# Altium PCB gateway(1).PcbDoc
Units mil, origin at the board's own origin, x right, y up, seen from the top; angles counter-clockwise.
Board outline 6000 x 4000 mil, 2 copper layers (Top Layer, Bottom Layer); 90 components, 78 nets, 356 pads, 205 vias.
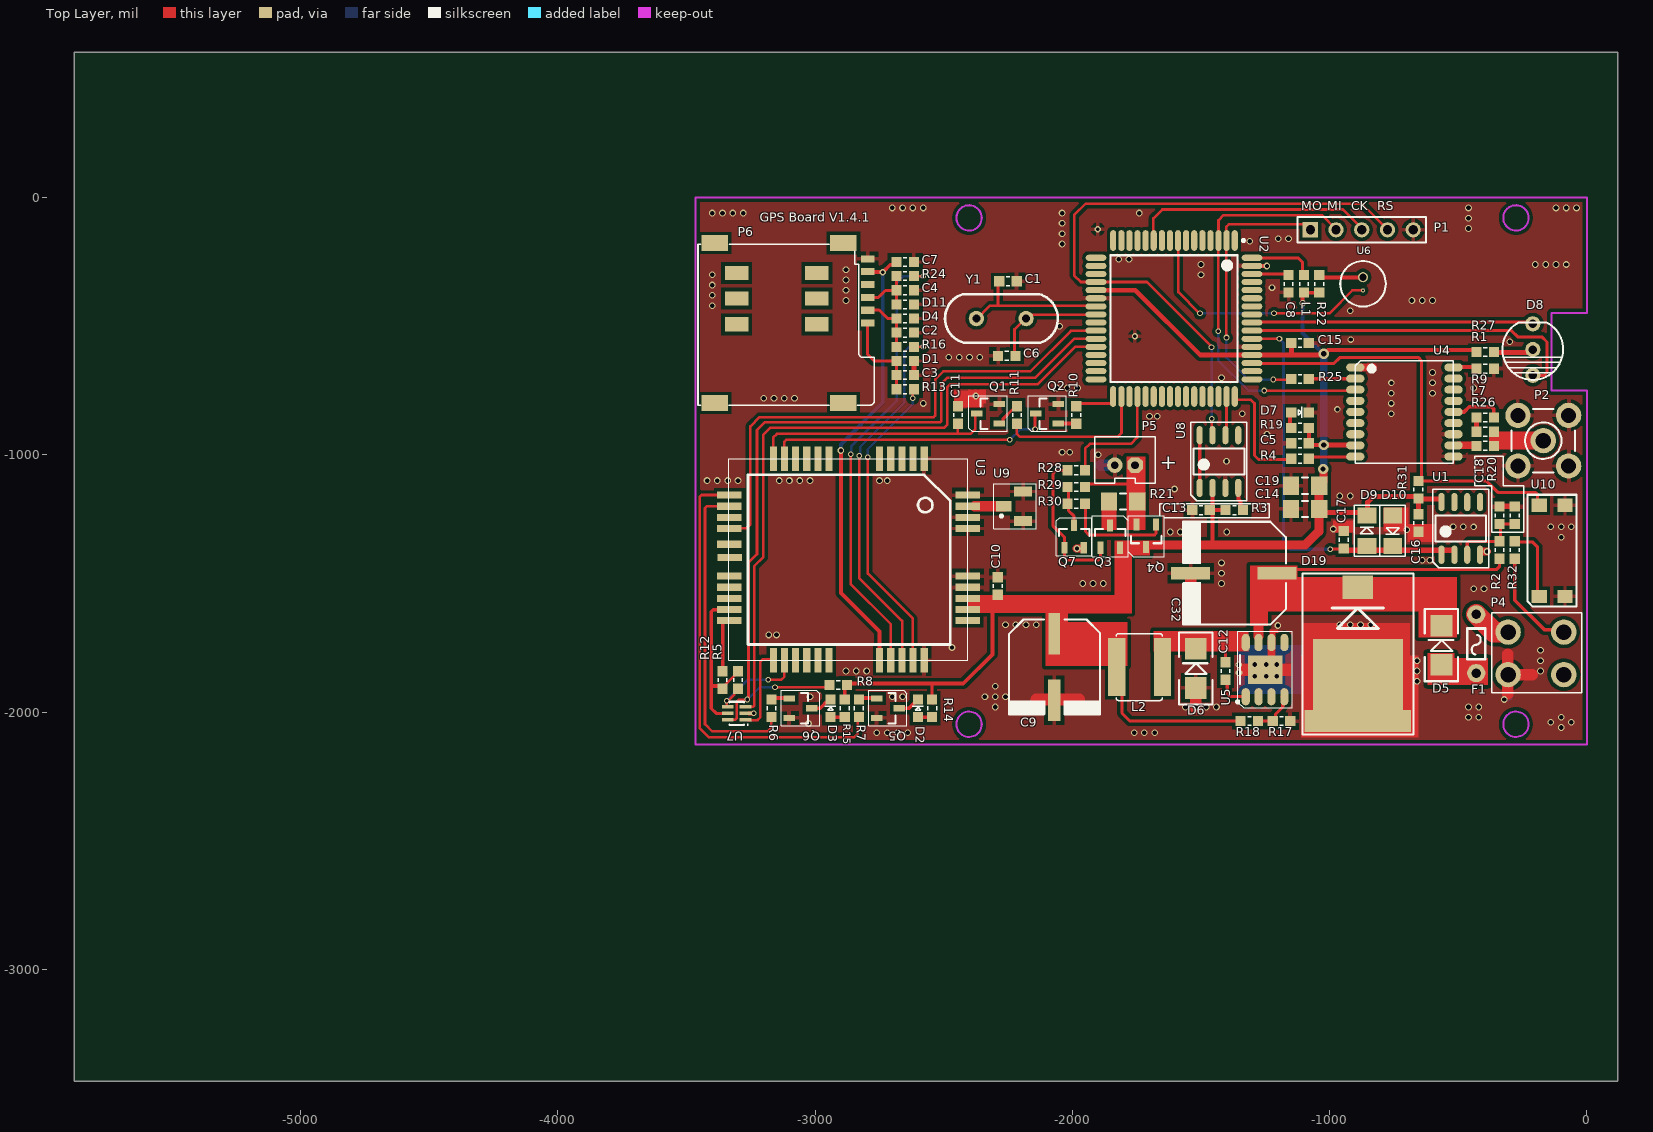
[diagram p0: Top Layer view]
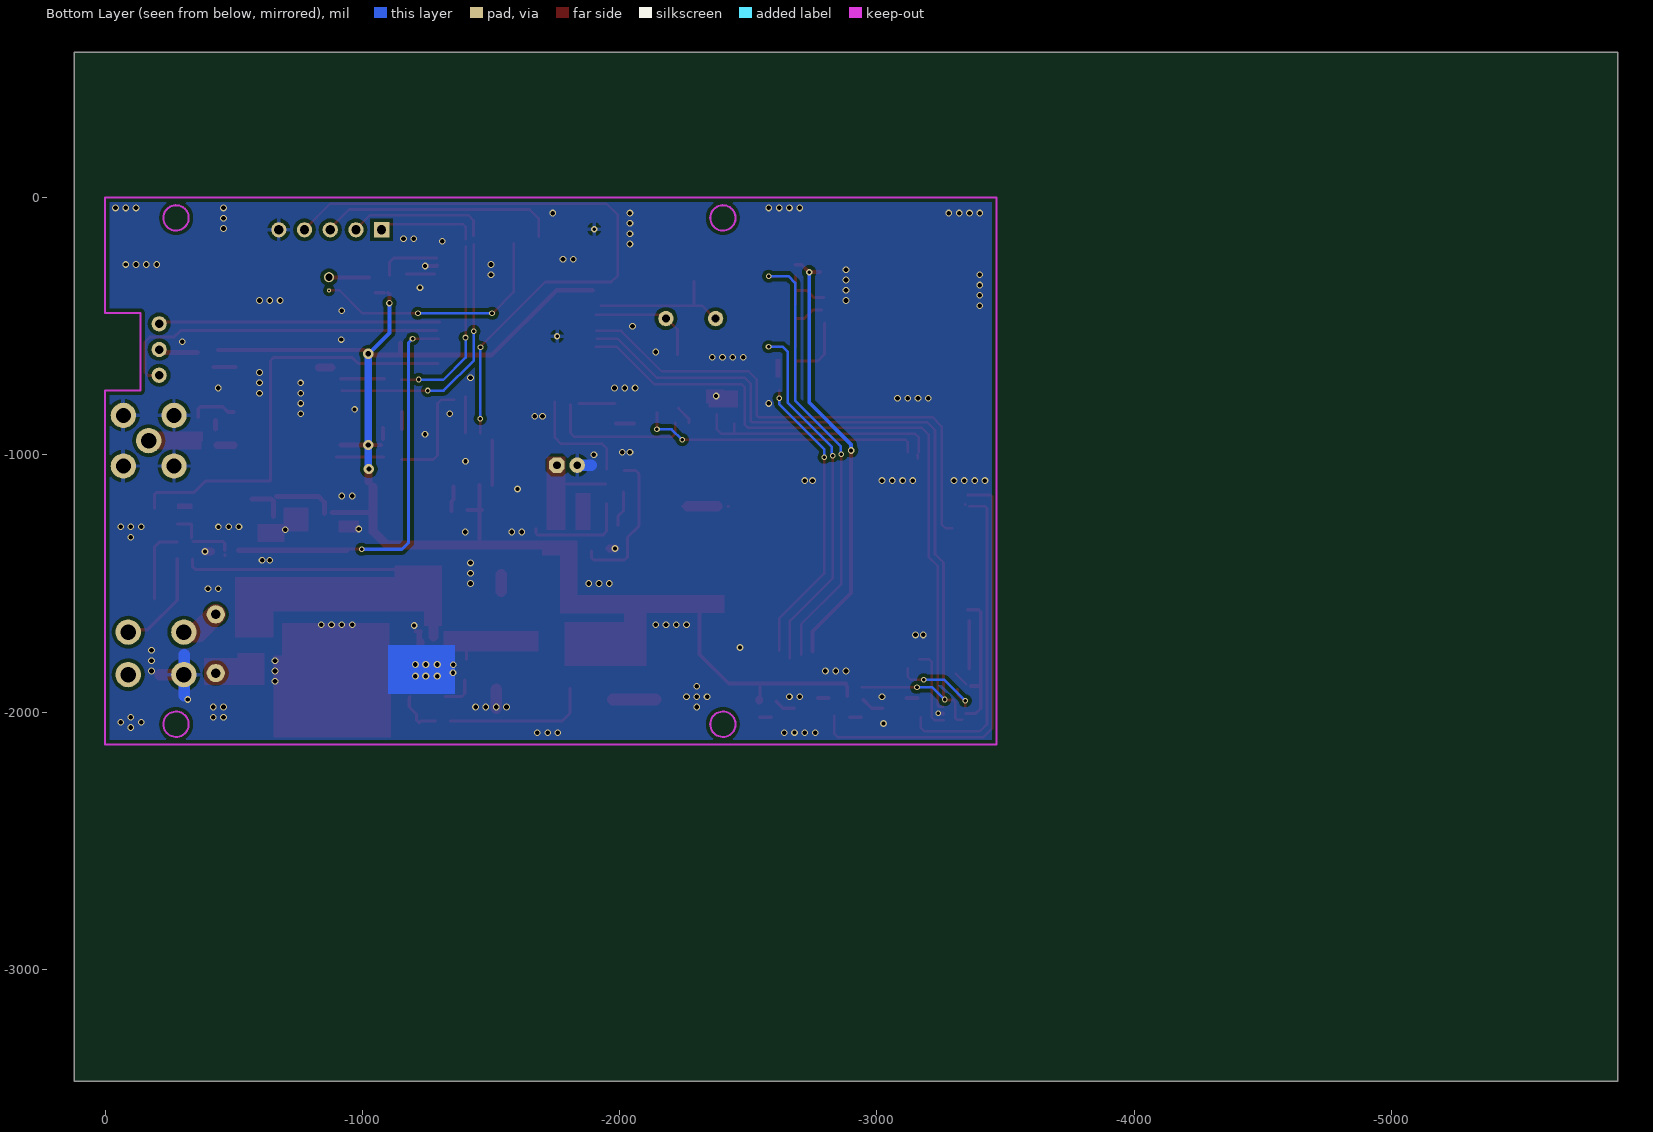
[diagram p1: Bottom Layer view, seen from below]

## Layer stack, top to bottom
Top Layer: signal copper 1.4
Dielectric: dielectric 12.6, FR-4, Dk 4.8
Bottom Layer: signal copper 1.4

## Board outline
-5880,-3435 120,-3435 120,565 -5880,565

## Design rules (kind name [scope] priority, off if disabled: settings)
Clearance [All] p1 off: gap=14
ComponentClearance [All] p1 off: gap=10 collisioncheckmode=3 verticalgap=10
PolygonConnect [All] p1: connectstyle=Relief reliefconductorwidth=15 reliefentries=4 polygonreliefangle="90 Angle"
RoutingVias [All] p1: holewidth=28 width=50 viastyle="Through Hole" minholewidth=10 minwidth=20 maxholewidth=28 maxwidth=50
SolderMaskExpansion [All] p1: expansion=4
TestPointUsage [All] p1: valid=0 allowmultiple=FALSE
Testpoint [All] p1: side=15 testpointundercomponent=TRUE minsize=40 maxsize=100 preferedsize=60 minholesize=0 maxholesize=40 preferedholesize=32 testpointgrid=1 style=1023 order=0123456789
Width [All] p1: maxlimit=200 minlimit=8 preferedwidth=10 toplayer_prefwidth=12 bottomlayer_prefwidth=12 minimp=50.000000 maximp=50.000000 favimp=50.000000
18 further rules are at their usual default settings.

## Components (designator, comment, footprint, x,y, rotation, side; value= is the part's Value field where it differs from the comment)
C1 "Cap" 0603 -2250,-325 r0 top
C2 "Cap" 0603 -2650,-525 r0 top
C3 "Cap" 0603 -2650,-690 r180 top
C4 "Cap" 0603 -2650,-360 r0 top
C5 "Cap" 0603 -1115,-955 r0 top
C6 "Cap" 0603 -2255,-615 r180 top
C7 "Cap" 0603 -2650,-250 r180 top
C8 "Cap" 0603 -1160,-335 r270 top
C9 "Cap Pol3" C8X10-SMD -2070,-1825 r270 top
C10 "Cap" 0603 -2290,-1510 r270 top
C11 "Cap" 0603 -2445,-845 r90 top
C12 "Cap" 0603 -1405,-1840 r270 top
C13 "Cap" 0603 -1500,-1215 r0 top
C14 "Cap" 3216[1206] -1095,-1210 r0 top
C15 "Cap" 0603 -1115,-565 r180 top
C16 "Cap" 0603 -655,-1265 r270 top
C17 "Cap" 0603 -945,-1330 r270 top
C18 "Cap" 0603 -340,-1235 r90 top
C19 "Cap" 3216[1206] -1095,-1120 r0 top
C32 "Cap Pol3" C10-SMD -1370,-1460 r180 top
D1 "RL0603E012M100K" 0603 -2650,-635 r0 top
D2 "WORK" 0603-LED -2600,-1985 r90 top
D3 "LINK" 0603-LED -2940,-1985 r90 top
D4 "RL0603E012M100K" 0603 -2650,-470 r0 top
D5 "SS54" SMA -565,-1740 r90 top
D6 "SS54" SMA -1520,-1830 r90 top
D7 "PW" 0603-LED -1115,-835 r0 top
D8 "LED" DIP-3 -210,-590.55 r90 top
D9 "4148" LL34 -855,-1295 r90 top
D10 "4148" LL34 -755,-1295 r270 top
D11 "RL0603E012M100K" 0603 -2650,-415 r0 top
D19 "SLD8S33A" SMTO-263 -890,-2035 r180 top
F1 "Fuse Thermal" PPTC-5.8 -430,-1620 r270 top
L1 "Inductor" 0603 -1100,-335 r270 top
L2 "Inductor" L-6045 -1650,-1825 r180 top
L7 "Inductor" 0603 -395,-910 r180 top
P1 "ISP" HDR1X5 -1075,-125 r0 top
P2 "ANTA" SMB_V-RJ45 -169.29,-944.88 r180 top locked
P4 "POW" 5569 -89.57,-1854.33 r90 top
P5 "BAT" PH2.0-2P -1835,-1040 r180 top
P6 "MircoSIM" "MICRO SIM" -3305,-292.52 r270 top
Q1 "NPN" SOT-23-NPN -2330,-840 r90 top
Q2 "NPN" SOT-23-NPN -2100,-840 r90 top
Q3 "PNP" SOT-23-PNP -1853,-1316 r0 top
Q4 "PNP" SOT-23-PNP -1713,-1316 r180 top
Q5 "NPN" SOT-23-NPN -2715,-1985 r270 top
Q6 "NPN" SOT-23-NPN -3055,-1985 r270 top
Q7 "NPN" SOT-23-NPN -1993,-1316 r0 top
R1 "Res1" 0603 -395,-665 r180 top
R2 "Res1" 0603 -340,-1370 r270 top
R3 "Res1" 0603 -1370,-1215 r180 top
R4 "Res1" 0603 -1115,-1015 r0 top
R5 "Res1" 0603 -3300,-1875 r270 top
R6 "Res1" 0603 -3170,-1985 r90 top
R7 "Res1" 0603 -2830,-1985 r90 top
R8 "Res1" 0603 -2910,-1895 r0 top
R9 "Res1" 0603 -395,-855 r0 top
R10 "Res1" 0603 -1985,-845 r90 top
R11 "Res1" 0603 -2215,-845 r270 top
R12 "Res1" 0603 -3360,-1875 r270 top
R13 "Res1" 0603 -2650,-745 r0 top
R14 "Res1" 0603 -2545,-1985 r270 top
R15 "Res1" 0603 -2885,-1985 r270 top
R16 "Res1" 0603 -2650,-580 r0 top
R17 "Res1" 0603 -1187,-2035 r180 top
R18 "Res1" 0603 -1312,-2035 r0 top
R19 "Res1" 0603 -1115,-895 r180 top
R20 "Res1" 0603 -280,-1235 r270 top
R21 "Res1" 3216[1206] -1803,-1181 r0 top
R22 "Res1" 0603 -1040,-335 r270 top
R24 "Res1" 0603 -2650,-305 r0 top
R25 "Res1" 0603 -1115,-705 r180 top
R26 "Res1" 0603 -395,-965 r180 top
R27 "Res1" 0603 -395,-600 r180 top
R28 "Res1" 0603 -1985,-1060 r0 top
R29 "Res1" 0603 -1985,-1125 r180 top
R30 "Res1" 0603 -1985,-1190 r180 top
R31 "Res1" 0603 -655,-1135 r270 top
R32 "Res1" 0603 -280,-1370 r90 top
U1 "LM358D" SOIC8 -490,-1285 r90 top
U2 "ATmega64-16AC" 64A_M -1605,-470 r270 top
U3 "G3524" G3524 -2635,-1430 r270 top
U4 "L70-R" L-70R -900,-660 r180 top
U5 "LM22676" ? -1251,-1835 r90 top
U6 "SW-18015P" SW-18015 -870,-335 r270 top
U7 "NC7WZ07" SC70-6 -3305,-2005 r90 top
U8 "MAX706RCSA" SOIC8 -1430,-1025 r90 top
U9 "IPEX" IPEX -2220,-1200 r180 top
U10 "EL817" PCBComponent_1 -185,-1550 r90 top
Y1 "XTAL" 49SD -2180,-470 r180 top

## Footprints (in the part's own frame and the unit in brackets; to place one, negate y for a bottom-side part, rotate by r counter-clockwise, add the part's x,y. Pads: shape width x height; smd on the part's side, far side on the other; paste and mask are expansions set on the pad)
49SD [mil]
  round 60 hole 30: 1(0,0) 2(193,0)
  silkscreen extent -124,-95 315,94
64A_M [mm] "64-Pin Thin Quad Flat Pack 0.8 mm Pitch, IPC Low Density"
  oval 2.05x0.6 smd: 1(-7.7,6) 2(-7.7,5.2) 3(-7.7,4.4) 4(-7.7,3.6) 5(-7.7,2.8) 6(-7.7,2) 7(-7.7,1.2) 8(-7.7,0.4) 9(-7.7,-0.4) 10(-7.7,-1.2) 11(-7.7,-2) 12(-7.7,-2.8) 13(-7.7,-3.6) 14(-7.7,-4.4) 15(-7.7,-5.2) 16(-7.7,-6) 33(7.7,-6) 34(7.7,-5.2) 35(7.7,-4.4) 36(7.7,-3.6) 37(7.7,-2.8) 38(7.7,-2) 39(7.7,-1.2) 40(7.7,-0.4) 41(7.7,0.4) 42(7.7,1.2) 43(7.7,2) 44(7.7,2.8) 45(7.7,3.6) 46(7.7,4.4) 47(7.7,5.2) 48(7.7,6)
  oval 0.6x2.05 smd: 17(-6,-7.7) 18(-5.2,-7.7) 19(-4.4,-7.7) 20(-3.6,-7.7) 21(-2.8,-7.7) 22(-2,-7.7) 23(-1.2,-7.7) 24(-0.4,-7.7) 25(0.4,-7.7) 26(1.2,-7.7) 27(2,-7.7) 28(2.8,-7.7) 29(3.6,-7.7) 30(4.4,-7.7) 31(5.2,-7.7) 32(6,-7.7) 49(6,7.7) 50(5.2,7.7) 51(4.4,7.7) 52(3.6,7.7) 53(2.8,7.7) 54(2,7.7) 55(1.2,7.7) 56(0.4,7.7) 57(-0.4,7.7) 58(-1.2,7.7) 59(-2,7.7) 60(-2.8,7.7) 61(-3.6,7.7) 62(-4.4,7.7) 63(-5.2,7.7) 64(-6,7.7)
  silkscreen extent -7.82,-6.25 6.25,6.98, body extent -7,-7 7,7, height 1.2
0603 [mm]
  rect 1x1 smd: 1(-0.864,0) 2(0.864,0)
  silkscreen extent -0.18,-0.43 0.18,0.43
0603-LED [mm]
  rect 1x1 smd: 1(-0.864,0) 2(0.864,0)
  silkscreen extent -0.18,-0.51 0.18,0.56
3216[1206] [mm] "Chip Resistor; Body 3.2 x 1.6 mm (LxW typ)"
  rect 1.6x1.8 smd: 1(-1.4,0) 2(1.4,0)
  silkscreen extent -0.3,-0.8 0.3,0.8
5569 [mm]
  round 2.5 hole 1.524: 1(0,0) 2(4.2,0) 3(4.2,5.5) 4(0,5.5)
  silkscreen extent -1.78,-1.78 6.1,7.11
C8X10-SMD [mm]
  rect 4.1x1.148 smd: 1(-3.277,0)
  rect 4.1x1.25 smd: 2(3.277,0)
  silkscreen extent -4.7,-4.5 4.7,4.5, body extent -4.65,-4.25 4.65,4.25, height 10.5
C10-SMD [mm]
  rect 3.85x1.25 smd: 1(-4.191,0) 2(4.318,0)
  silkscreen extent -5.08,-5.08 5.08,5.08
DIP-3 [mm]
  round 1.5 hole 0.84: 1(-2.54,0) 2(0,0) 3(2.54,0)
  silkscreen extent -2.99,-2.99 2.68,3.01
G3524 [mm]
  rect 2.4x0.7 smd: 1(-10.55,1.5) 2(-10.55,0.4) 3(-10.55,-0.7) 4(-10.55,-1.8) 5(-10.55,-2.9) 6(-10.55,-7.9) 7(-10.55,-9) 8(-10.55,-10.1) 9(-10.55,-11.2) 10(-10.55,-12.3) 11(-10.55,-13.4) 21(9.35,-13.4) 22(9.35,-12.3) 23(9.35,-11.2) 24(9.35,-10.1) 25(9.35,-9) 26(9.35,-7.9) 27(9.35,-2.9) 28(9.35,-1.8) 29(9.35,-0.7) 30(9.35,0.4) 31(9.35,1.5)
  rect 0.7x2.4 smd: 12(-6.95,-17.75) 13(-5.85,-17.75) 14(-4.75,-17.75) 15(-3.65,-17.75) 16(1.05,-17.75) 17(2.15,-17.75) 18(3.25,-17.75) 19(4.35,-17.75) 20(5.45,-17.75) 32(5.45,5.8) 33(4.35,5.8) 34(3.25,5.8) 35(2.15,5.8) 36(1.05,5.8) 37(-3.65,5.8) 38(-4.75,5.8) 39(-5.85,5.8) 40(-6.95,5.8) 41(-2.1,-17.75) 42(-0.8,-17.7)
  silkscreen extent -10.55,-17.8 9.35,5.8
HDR1X5 [mm] "Connector; Header; 5 Position"
  rect 1.5x1.5 hole 0.9: 1(0,0)
  round 1.5 hole 0.9: 2(2.54,0) 3(5.08,0) 4(7.62,0) 5(10.16,0)
  silkscreen extent -1.27,-1.27 11.43,1.27
IPEX [mil] "SOT23, 3-Leads, Body 3.0x2.6mm (max), Pitch 0.95mm, IPC Medium Density"
  rect 59.06x41.34 smd: 1(46.5,-0.5)
  rect 70.87x39.37 smd: 2(-28.5,57.5) 3(-28.5,-57.5)
  silkscreen extent -80,-89 86,88
L-70R [mm]
  oval 1.8x0.8 smd: 1(0,0) 2(0,1.1) 3(0,2.2) 4(0,3.3) 5(0,4.4) 6(0,5.5) 7(0,6.6) 8(0,7.7) 9(0,8.8) 10(-9.7,8.8) 11(-9.7,7.7) 12(-9.7,6.6) 13(-9.7,5.5) 14(-9.7,4.4) 15(-9.7,3.3) 16(-9.7,2.2) 17(-9.7,1.1) 18(-9.7,0)
  silkscreen extent -9.65,-0.66 0,9.47
L-6045 [mm]
  rect 1.7x5.7 smd: 1(0,0) 2(4.5,0)
  silkscreen extent 0,-3.3 4.57,3.3
LL34 [mm] "MELF Diode, 2-Leads, Body 3.3x1.6mm, IPC Medium Density"
  rect 1.575x1.85 smd: 1(-1.5,0) 2(1.5,0)
  silkscreen extent -2.54,-1.27 2.54,1.27, body extent -1.65,-0.82 1.65,0.82, height 1.65
"MICRO SIM" [mm]
  rect 1.55x2.6 smd: 0(-2.95,10.53) 0(-2.95,-2.15) 0(12.85,10.53) 0(12.85,-2.15)
  rect 1.4x2.3 smd: 0(0,7.92) 0(0,0) 0(2.54,7.92) 0(2.54,0) 0(5.08,7.92) 0(5.08,0)
  rect 0.7x1.35 smd: 1(-0.12,12.955) 2(2.42,12.955) 3(4.96,12.955) 5(-1.39,12.955) 6(1.15,12.955) 7(3.69,12.955)
  silkscreen extent -2.82,-3.82 13.05,13.58
PCBComponent_1 [mm]
  rect 1.3x1.5 smd: 1(0,0) 2(0,-2.54) 3(9,-2.54) 4(9,0)
  round 0.635 on Top Overlay: 3(-0.254,1.778)
  silkscreen extent -1.02,-3.68 10.03,1.14
PH2.0-2P [mil]
  oct 60x60 hole 30: 1(-78.74,0)
  round 60 hole 30: 2(0,0)
  silkscreen extent -157,-110 79,70
PPTC-5.8 [mm]
  round 1.8 hole 0.92: 1(0,0) 2(5.8,0)
  silkscreen extent 1.4,-0.89 4.44,0.89
SC70-6 [mm]
  rect 0.35x1.15 smd: 1(-0.65,-0.875) 2(0,-0.875) 3(0.65,-0.875) 4(0.65,0.889) 5(0,0.889) 6(-0.65,0.889)
  silkscreen extent -1.17,-1.15 1.15,0.7
SMA [mm] "Molded Diode, 2-Leads, Body 4.3x2.7mm, IPC Medium Density"
  rect 2.15x2.15 smd: 1(-1.93,0) 2(1.93,0)
  silkscreen extent -3.56,-1.65 3.56,1.65, body extent -2.28,-1.42 2.29,1.42, height 2.95
SMB_V-RJ45 [mm] "Connector; SMB Straight"
  round 2.5 hole 1.5: 1(0,0) 2(-2.5,2.5) 2(-2.5,-2.5) 2(2.5,2.5) 2(2.5,-2.5)
  silkscreen extent -3.15,-3.15 3.15,3.15
SMTO-263 [mm]
  rect 3x2.3 smd: 1(0,-13.208)
  rect 10.5x2.16 smd: 2(0,0)
  rect 8.89x7.05 smd: 2(0,-4.572)
  silkscreen extent -5.49,-14.55 5.49,1.32
SOIC8 [mm]
  oval 1.8x0.6 smd: 1(-2.625,1.905) 2(-2.625,0.635) 3(-2.625,-0.635) 4(-2.625,-1.905) 5(2.575,-1.905) 6(2.575,-0.635) 7(2.575,0.635) 8(2.575,1.905)
  silkscreen extent -3.89,-2.74 3.84,2.77, body extent -2.03,-2.5 1.97,2.5, height 1.76
SOT-23-NPN [mm]
  rect 0.6x1.143 smd: 1(0.95,-1.15) 2(-0.95,-1.15) 3(0,1.067)
  silkscreen extent -1.75,-1.93 1.75,1.83, body extent -1.5,-0.7 1.5,0.7, height 1.1
SOT-23-PNP [mm]
  rect 0.6x1.2 smd: 1(0.95,-1.15) 2(-0.95,-1.15) 3(0,1.067)
  silkscreen extent -1.78,-2.03 1.78,2.03, body extent -1.5,-0.7 1.5,0.7, height 1.1
SW-18015 [mm]
  round 0.4 hole 0.2: 1(0.65,0)
  round 1 hole 0.7: 2(-0.65,0)
  silkscreen extent -2.25,-2.25 2.25,2.25
? [mm]
  oval 1.7x0.8 smd: 1(-2.675,1.905) 2(-2.675,0.635) 3(-2.675,-0.635) 4(-2.675,-1.905) 5(2.675,-1.905) 6(2.675,-0.635) 7(2.675,0.635) 8(2.675,1.905)
  rect 2.8x3.4 smd: 9(0,0)
  silkscreen extent -3.78,-2.7 3.77,2.82

## Part data
C1 C2 C3 C4 C5 C6 C7 C8 C10 C11 C12 C13 C14 C15 C16 C17 C18 C19: "Capacitor"
C9: library part "Cap Pol1", "Polarized Capacitor (Radial)"
C32: "Polarized Capacitor (Surface Mount)"
D1: library part SMF05C
D2 D3 D7 D8: library part LED2, "Typical RED, GREEN, YELLOW, AMBER GaAs LED"
D4 D11 D19: library part "Diode 18TQ045", "Schottky Rectifier"
D5 D6 D9 D10: library part "Diode 1N5408", "3 Amp Medium Power Silicon Rectifier Diode"
F1: "Thermal Fuse"
P1: library part "Header 5", "Header, 5-Pin"
P2: library part SMB, "SMB Straight Connector"
P4 P5: library part "Header 2", "Header, 2-Pin"
Q1 Q2 Q5 Q6 Q7: library part 2N5551, "NPN General Purpose Amplifier"
Q3 Q4: library part 2N5401, "PNP General Purpose Amplifier"
R1 R2 R3 R4 R5 R6 R7 R8 R9 R10 R11 R12 R13 R14 R15 R16 R17 R18 R19 R20 R21 R22 R24 R25 R26 R27 R28 R29 R30 R31 R32: "Resistor"
U1: "Dual Low-Power Operational Amplifier"
U2: library part ATmega8-16AC, "8-Bit AVR Microcontroller with 8K Bytes of In-System Programmable Flash Memory"
U3: library part USR-GM3
U4: library part UM220-III
U5: library part LM22676-5.0
U6: library part LP5907
U8: "+3V Voltage Monitoring, Low-Cost, 礟 Supervisory Circuit"
U10: library part Optoisolator1, "4-Pin Phototransistor Optocoupler"
Y1: "Crystal Oscillator"

## Via types
v1: diameter 26, hole 18, Top Layer to Bottom Layer, 146 vias
v2: diameter 22, hole 14, Top Layer to Bottom Layer, 23 vias
v3: diameter 26, hole 16, Top Layer to Bottom Layer, 22 vias
v4: diameter 28, hole 18, Top Layer to Bottom Layer, 6 vias
v5: diameter 26, hole 15, Top Layer to Bottom Layer, 2 vias
v6: diameter 40, hole 20, Top Layer to Bottom Layer, 2 vias
v7: diameter 24, hole 14, Top Layer to Bottom Layer, 2 vias
v8: diameter 25, hole 15, Top Layer to Bottom Layer, 1 vias
v9: diameter 40, hole 22, Top Layer to Bottom Layer, 1 vias

## Nets (pads, with @x,y where several pads share a name; then routed paths per layer and width w, separated by ;. In a path a pad name is that pad's centre, name@x,y a point inside that pad or via, vN(x,y) a via of type N, cw(c..) or ccw(c..) an arc to the next point about the centre after c; other vN are vias at no path point)
+4.2V: C5.2 C9.1 C10.2 C13.2 C14.2 C15.2 C16.1 C19.2 D9.2 L1.2 L2.2 Q3.1 Q4.3 R3.2 R8.2 R14.1 R15.1 R18.1 R19.1 R22.2 R27.2 R31.2 U1.8 U2.21 U2.52 U3.33 U3.34 U4.8 U8.2 | length 5736.5
  Top Layer w12: R14.1@-2545,-1947 -2545,-1888 ; L2.2@-1807,-1907 -1807,-2004 -1776,-2035 R18.1@-1341,-2035
  Top Layer w15: R15.1@-2885,-1937 -2885,-1900 R8.2@-2874,-1889 ; R8.2@-2880,-1889 -2424,-1889 -2311,-1776 -2311,-1596 ; C13.2@-1465,-1215 R3.2@-1409,-1215 ; -1455,-1348 U8.2@-1455,-1117 ; v8(-1105,-410) L1.2@-1105,-374 ; L1.2@-1085,-370 R22.2@-1051,-370 ; C5.2@-1080,-939 R19.1@-1080,-905 ; C5.2@-1073,-962 v6@-1024,-962 ; v9@-1020,-606 -1007,-593 R27.2@-439,-593
  Top Layer w18: U2.21@-1895,-360 -1755,-360 -1503.27,-611.73 v9@-1036.73,-611.73 ; -1148,-607 C15.2@-1148,-565
  Top Layer w20: v6@-1024,-962 U4.8@-918,-962 ; C14.2@-1020,-1224 D9.2@-882,-1224 ; D9.2@-852,-1227 -852,-1184 -830,-1162 R31.2@-666,-1162 ; C16.1@-655,-1239 R31.2@-655,-1179 ; R31.2@-646,-1172 U1.8@-571,-1172
  Top Layer w30: R14.1@-2543.27,-1950.89 R14.1@-2543,-1955 ; C19.2@-1024,-1104.12 v6@-1024,-1055
  Top Layer w35: Q4.3@-1720,-1350 -1095,-1350 -1042,-1297 C19.2@-1042,-1125
  Bottom Layer w15: v8(-1105,-410) -1105,-526 v9@-1023,-608
  Bottom Layer w30: v6@-1023,-1056 v9@-1023,-608
  other v6: -1025,-1055 -1023,-962
  other v9: -1023,-607
ACC: P4.2 R32.1 | length 403.6
  Top Layer w15: R32.1 -280,-1565 -165,-1680 P4.2@-85,-1680
ACC_T: R31.1 U2.51 U10.4 | length 1658
  Top Layer w12: U2.51@-1293,-644.88 -983.88,-644.88 -961,-622 -654,-622 -643,-633 R31.1@-643,-1101 ; R31.1@-642,-1102 -389,-1102 -344,-1147 -199,-1147 -191,-1155 U10.4@-191,-1208
BAT: R28.2 U2.36 | length 439.4
  Top Layer w10: R28.2@-1950,-1055 -1950,-975 -1932,-957 -1772,-957 -1748,-933 U2.36@-1748,-793
D1: D8.1 U2.55 | length 1309.9
  Top Layer w12: U2.55@-1290,-517 -293,-517 -269,-541 -175,-541 -155,-561 -155,-679.55 -167.45,-692 D8.1@-188,-692
D2: D8.3 U2.56 | length 1092
  Top Layer w12: U2.56@-1301,-484 D8.3@-209,-484
DOG: U2.47 U8.6 | length 142
  Top Layer w12: U8.6@-1401,-915 U2.47@-1401,-773
GIO2: U2.57
GND: C1.2 C2.2 C3.1 C4.2 C5.1 C6.2 C7.1 C8.2 C9.2 C10.1 C11.2 C13.1 C14.1 C15.1 C16.2 C17.1 C18.2 C19.1 C32.2 D1.2 D4.2 D6.1 D7.2 D10.1 D11.2 D19.2 P1.5 P2.2 P4.4 P5.2 P6.5 Q1.1 Q2.1 Q5.1 Q6.1 Q7.1 R1.1 R17.1 R20.1 U1.4 U2.22 U2.53 U2.63 U3.1 U3.31 U3.35 U3.36 U3.37 U3.38 U3.40 U4.1 U4.10 U4.12 U5.6 U5.9 U7.2 U8.3 U9.2 U9.3 U10.2 U10.3@-85,-1195.67 | length 1000.7
  Top Layer w15: U7.2@-3258,-2005 v2(-3238,-2005)
  Top Layer w16: U2.63@-1290,-265 v3@-1245.99,-265.35
  Top Layer w30: v3@-1983.68,-1364 Q7.1@-1961,-1364 ; U5.9@-1226,-1794 U5.6@-1226,-1726 ; U4.1@-880,-660 -830,-660 ; U1.4@-412,-1376 v3(-388,-1376)
  Top Layer w45: -2141,-1951 -1974,-1951 ; -1539,-1531 C32.2@-1539,-1466 ; v1@-1520,-1984 D6.1@-1520,-1911 ; -308,-1928 -308,-1775 ; P4.4@-307,-1854 -213,-1854
  Bottom Layer w45: -1890,-1040 P5.2@-1830,-1040 ; -307,-1937 -307,-1777
  other v1: -2760,-2080 -2720,-2080 -2640,-2080 -1760,-2080 -1720,-2080 -1680,-2080 -100,-2060 -140,-2040 -60,-2040 -460,-2020 -420,-2020 -100,-2020 -2300,-1980 -1560,-1980 -1520,-1980 -1480,-1980 -1440,-1980 -460,-1980 -420,-1980 -3020,-1940 -2700,-1940 -2660,-1940 -2340,-1940 -2300,-1940 -2260,-1940 -2300,-1900 -660,-1880 -2880,-1840 -2840,-1840 -2800,-1840 -660,-1840 -180,-1840 -660,-1800 -180,-1800 -180,-1760 -3180,-1700 -3150,-1700 -2260,-1660 -2220,-1660 -2180,-1660 -2140,-1660 -960,-1660 -920,-1660 -880,-1660 -840,-1660 -440,-1520 -400,-1520 -1960,-1500 -1920,-1500 -1880,-1500 -1420,-1500 -1420,-1460 -1420,-1420 -640,-1410 -610,-1410 -100,-1320 -1620,-1300 -1580,-1300 -1400,-1300 -520,-1280 -480,-1280 -140,-1280 -100,-1280 -60,-1280 -960,-1160 -920,-1160 -3420,-1100 -3380,-1100 -3340,-1100 -3300,-1100 -3140,-1100 -3100,-1100 -3060,-1100 -3020,-1100 -2750,-1100 -2720,-1100 -1900,-1000 -2040,-990 -2010,-990 -1700,-850 -1670,-850 -1340,-840 -760,-840 -2580,-800 -760,-800 -3200,-780 -3160,-780 -3120,-780 -3080,-780 -760,-760 -600,-760 -2060,-740 -2020,-740 -1980,-740 -440,-740 -600,-720 -1420,-700 -600,-680 -2480,-620 -2440,-620 -2400,-620 -2360,-620 -2140,-600 -300,-560 -2050,-500 -920,-440 -3400,-420 -2880,-400 -680,-400 -640,-400 -600,-400 -3400,-380 -2880,-360 -3400,-340 -2880,-320 -3400,-300 -1500,-300 -2880,-280 -1500,-260 -200,-260 -160,-260 -120,-260 -1820,-240 -1780,-240 -2040,-180 -1310,-170 -1200,-160 -1160,-160 -2040,-140 -460,-120 -2040,-100 -460,-80 -3400,-60 -3360,-60 -3320,-60 -3280,-60 -2040,-60 -1740,-60 -2700,-40 -2660,-40 -2620,-40 -2580,-40 -460,-40 -120,-40 -80,-40 -40,-40
  other v3: -2680,-2080 -3026,-2044 -321,-1951 -1352,-1847 -1353,-1816 -2468,-1749 -1201,-1663 -1982,-1364 -700,-1291 -986,-1288 -440,-1280 -1603,-1133 -1401,-1025 -1243,-920 -970,-823 -2375,-771 -760,-720 -918,-552 -1224,-350 -1244,-266 -80,-260
  other v4: -1291,-1860 -1246,-1860 -1206,-1860 -1291,-1815 -1246,-1815 -1206,-1815
  other v7: -1757,-539 -1901,-123
GPS_RST: R4.1 U2.48 | length 420.2
  Top Layer w10: U2.48@-1357.78,-786 -1306,-786 -1292,-800 -1292,-1002 -1276,-1018 R4.1@-1152,-1018
GPS_RX: P1.2 U2.3 U4.3 | length 1557.7
  Top Layer w10: v2@-1433,-521 U2.3@-1433,-182 ; U2.3@-1432,-149 -1432,-88 -1412,-68 -1030,-68 P1.2@-977,-121 ; v2(-1254,-750) U4.3@-920,-750
  Bottom Layer w10: v2@-1433,-521 -1433,-633 -1316,-750 v2@-1255,-750
  other v2: -1433,-520
GPS_TX: R25.1 U4.2 | length 170
  Top Layer w12: R25.1@-1086,-704 U4.2@-916,-704
GSM_PW: R10.2 U2.33 | length 139
  Top Layer w12: R10.2@-1982,-800 U2.33@-1843,-800
GSM_RST: R11.2 U2.34 | length 571.9
  Top Layer w10: R11.2@-2216,-875 -2216,-918 -2204,-930 -1824,-930 -1809,-915 U2.34@-1809,-804.28
GSM_RX: R8.1 U2.27 U7.6 | length 3089.3
  Top Layer w10: U7.6@-3332,-2030 -3311,-2030 -3305,-2024 -3305,-1960 -3298,-1953 -3265,-1953 -3259,-1947 -3259,-1419 -3226,-1386 -3226,-904 -3196,-874 -2514,-874 -2509,-869 -2509,-723 -2487,-701 -2145,-701 -1993,-549 U2.27@-1911,-549 ; v2(-3156,-1904) R8.1@-2942,-1904
  Bottom Layer w10: v2@-3263,-1951 -3216,-1904 -3157,-1904 v2@-3156.5,-1904.5
  other v2: -3264,-1951
GSM_TX: U2.28 U7.3 | length 2612.2
  Top Layer w10: U7.3@-3258,-1980 -3241,-1980 -3237,-1976 -3237,-1433 -3201,-1397 -3201,-921 -3175,-895 -2499,-895 -2487,-883 -2487,-739 -2473,-725 -2134,-725 -1989,-580 U2.28@-1907,-580
LINK_LED: Q6.2 R6.2 | length 43
  Top Layer w15: R6.2@-3158,-1945 Q6.2@-3115,-1945
NetC1_1: C1.1 U2.23 Y1.2 | length 564.8
  Top Layer w10: Y1.2@-2375,-475 -2320,-420 U2.23@-1927,-420 ; -2289,-419 C1.1@-2289,-325
NetC6_1: C6.1 U2.24 Y1.1 | length 430.2
  Top Layer w10: C6.1@-2225,-611 -2225,-512 Y1.1@-2186,-473 ; Y1.1@-2183,-454.76 U2.24@-1907,-454.76
NetC8_1: C8.1 U2.62 | length 112
  Top Layer w12: U2.62@-1282,-297 C8.1@-1170,-297
NetC11_1: C11.1 Q1.3 U3.11 | length 966.6
  Top Layer w10: U3.11@-3163,-990 -3163,-932 -3149,-918 -2396,-918 -2377,-899 Q1.3@-2377,-842 ; U3.11@-3159,-1014.88 U3.11@-3158,-1000 ; -2445,-917 C11.1@-2445,-880
NetC12_1: C12.1 D6.2 L2.1 U5.8 | length 52
  Top Layer w12: C12.1@-1404,-1795 -1404,-1743
NetC12_2: C12.2 U5.1 | length 133
  Top Layer w12: C12.2@-1398,-1876 -1398,-1928 -1386,-1940 U5.1@-1322,-1940
NetC18_1: C18.1 R2.1 R20.2 U1.3 | length 268.9
  Top Layer w12: U1.3@-466,-1393 U1.3@-465.9,-1388.34 ; U1.3@-465,-1372 -465,-1343 -458,-1336 R2.1@-341,-1336 ; R2.1@-336,-1322.19 C18.1@-336,-1268 ; C18.1@-334,-1269 R20.2@-279.81,-1269
NetD2_1: D2.1 R14.2 | length 43
  Top Layer w15: D2.1@-2588,-2020 R14.2@-2545,-2020
NetD2_2: D2.2 Q5.3 | length 79.8
  Top Layer w15: Q5.3@-2678,-1985 -2635,-1985 D2.2@-2609,-1959
NetD3_1: D3.1 R15.2 | length 43
  Top Layer w15: D3.1@-2938,-2020 R15.2@-2895,-2020
NetD3_2: D3.2 Q6.3 | length 88.3
  Top Layer w15: Q6.3@-3023,-1985 -2980,-1985 D3.2@-2948,-1953
NetD5_1: D5.1 F1.2
NetD7_1: D7.1 R19.2 | length 67
  Top Layer w15: R19.2@-1154,-900 D7.1@-1154,-833
NetD8_2: D8.2 R27.1 | length 143
  Top Layer w18: R27.1@-360,-602 D8.2@-217,-602
NetL1_1: L1.1 U2.64 | length 241
  Top Layer w12: U2.64@-1289,-235 -1122,-235 -1105,-252 L1.1@-1105,-302
NetL7_1: L7.1 P2.1 R26.1 | length 32
  Top Layer w15: R26.1@-360,-950 L7.1@-360,-918
NetL7_2: L7.2 R9.1 | length 32
  Top Layer w20: L7.2@-429,-899 R9.1@-429,-867
NetP5_1: P5.1 Q4.1 R21.2 R29.1 | length 189
  Top Layer w12: R29.1@-1946,-1114 -1757,-1114
NetQ1_2: Q1.2 R11.1 | length 75
  Top Layer w12: Q1.2@-2270,-875 -2270,-861 -2229,-820 R11.1@-2229,-817
NetQ2_2: Q2.2 R10.1 | length 70
  Top Layer w15: Q2.2@-2056,-878 R10.1@-1986,-878
NetQ2_3: Q2.3 U3.10 | length 1098.3
  Top Layer w10: U3.10@-3120,-990 -3120,-950 -3111,-941 v2(-2243,-941)
  Top Layer w12: v2@-2145,-900 Q2.3@-2145,-836
  Bottom Layer w10: v2@-2242,-941 -2202,-901 v2(-2145,-901)
NetQ3_2: Q3.2 Q7.2 R28.1 | length 584.6
  Top Layer w12: Q7.2@-2031,-1358 Q7.2@-2030.94,-1361.29 ; R28.1@-2017,-1061 -2063,-1061 -2076,-1074 -2076,-1275 -2030,-1321 -2030,-1398 -2019,-1409 -1899,-1409 -1891,-1401 Q3.2@-1891,-1374
NetQ3_3: Q3.3 R21.1
NetQ4_2: Q4.2 R30.1 | length 409.3
  Top Layer w12: R30.1@-1949,-1190 -1949,-1298 -1935,-1312 -1681,-1312 -1675,-1306 Q4.2@-1675,-1287
NetQ7_3: Q7.3 R29.2 R30.2 | length 139.1
  Top Layer w12: -2015,-1145 -2015,-1217 -1993,-1239 Q7.3@-1993,-1275
NetR1_2: R1.2 U4.18 | length 86
  Top Layer w15: U4.18@-507,-658 R1.2@-421,-658
NetR3_1: R3.1 U8.4 | length 99.3
  Top Layer w15: U8.4@-1354,-1122 -1354,-1173 -1346,-1181 R3.1@-1346,-1218
NetR4_2: R4.2 U4.9 | length 186
  Top Layer w12: R4.2@-1084,-1008 U4.9@-898,-1008
NetR5_2: R5.2 U3.22 U7.4 | length 376.2
  Top Layer w10: U7.4@-3343,-1979 -3343,-1960 -3314,-1931 -3314,-1914 R5.2@-3312,-1912 ; v2@-3183,-1874 -3131,-1874 -3120,-1863 U3.22@-3120,-1828.75
  Bottom Layer w10: v2@-3342,-1955 -3261,-1874 v2@-3181,-1874
  other v2: -3343,-1956 -3182,-1874
NetR6_1: R6.1 U3.13 | length 1227.1
  Top Layer w10: U3.13@-3360,-1199 -3420,-1199 -3428,-1207 -3428,-2047 -3400,-2075 -3185,-2075 -3170,-2060 R6.1@-3170,-2020
NetR7_1: R7.1 U3.12 | length 1702
  Top Layer w10: U3.12@-3353,-1156 -3441,-1156 -3449,-1164 -3449,-2061 -3412,-2098 -2848,-2098 -2835,-2085 R7.1@-2835,-2014
NetR9_2: R9.2 U4.14 | length 181
  Top Layer w15: U4.14@-499,-833 -477,-833 -457,-813 -371,-813 -362,-822 R9.2@-362,-854
NetR12_1: R12.1 U3.20 | length 189
  Top Layer w12: R12.1@-3359,-1833 U3.20@-3359,-1644
NetR13_2: R13.2 U3.30 | length 1154
  Top Layer w10: v2@-2795,-1010 -2795,-1462 -2620,-1637 U3.30@-2620,-1761 ; v2@-2621,-779 R13.2@-2621,-749
  Bottom Layer w10: v2@-2795,-1007 -2795,-978 -2620,-803 v2@-2620,-779
  other v2: -2796,-1009 -2620,-780
NetR16_2: R16.2 U3.29 | length 1454.7
  Top Layer w10: v2@-2829,-1003 -2829,-1478 -2662,-1645 U3.29@-2662,-1790 ; R16.2@-2621,-580 v2@-2578,-580
  Bottom Layer w10: v2@-2825,-1001 -2825,-969 -2653,-797 -2653,-599 -2633,-579 v2@-2579,-579
  other v2: -2828,-1003 -2579,-580
NetR17_2: R17.2 R18.2 U5.4 | length 169.6
  Top Layer w12: R18.2@-1284,-2035 R17.2@-1226,-2035 ; R17.2@-1221,-2042 -1211,-2032 -1211,-2009 -1182,-1980 U5.4@-1182,-1948 ; U5.4@-1184.07,-1940.41 U5.4@-1184,-1939
NetR22_1: R22.1 U6.2 | length 156.6
  Top Layer w15: R22.1@-1025,-310 U6.2@-868.41,-310
NetR24_2: R24.2 U3.28 | length 1732.1
  Top Layer w10: v2@-2862,-1000 -2862,-1502 -2706,-1658 U3.28@-2706,-1777 ; R24.2 v2(-2580,-305)
  Bottom Layer w10: v2@-2860,-999 -2860,-967 -2682,-789 -2682,-331 -2656,-305 v2(-2580,-305)
  other v2: -2862,-997
NetR26_2: R26.2 U4.11 | length 63
  Top Layer w30: U4.11@-499,-963 R26.2@-436,-963
NetR32_2: R32.2 U10.1 | length 300.7
  Top Layer w12: R32.2@-281,-1338 -212,-1338 -191,-1359 U10.1@-191,-1561
NetU3_21: U3.21 U7.1 | length 319.3
  Top Layer w10: U7.1@-3259,-2031 -3224,-2031 -3213,-2020 -3213,-1804 -3204,-1795 U3.21@-3164,-1795
NetU3_39: U3.39 U9.1 | length 121.5
  Top Layer w10: U3.39@-2423.5,-1199.5 -2423.69,-1199.68 U3.39@-2421,-1199.68 ; U9.1@-2246.51,-1199.97 U9.1@-2244,-1200
  Top Layer w40: U3.39@-2380,-1200 U9.1@-2264,-1200
NetU8_1: U8.1 U8.8 | length 175
  Top Layer w15: U8.1@-1505,-1118 U8.8@-1505,-943
PDI: P1.1 R25.2 U2.2 | length 1086.5
  Top Layer w10: v2(-1401,-544) U2.2@-1401,-188.85 ; U2.2@-1401,-161 -1401,-113 -1392,-104 P1.1@-1087,-104 ; v2@-1218,-708 R25.2@-1151,-708
  Bottom Layer w10: v2@-1401,-543 -1401,-622 -1315,-708 v2@-1217,-708
  other v2: -1219,-707
RESEVER: P4.1
RST: P1.4 U2.20 U8.7 | length 2489
  Top Layer w10: U8.7@-1458,-915 v2@-1458,-861 ; v2@-1458,-580 -1710,-328 -1967,-328 -1993,-302 -1993,-68 -1948,-23 -875,-23 P1.4@-778,-120
  Bottom Layer w10: v2(-1458,-860) v2@-1458,-583
  other v2: -1459,-581
SCK: P1.3 U2.11 | length 923.3
  Top Layer w10: U2.11@-1685,-151 -1685,-81 -1650,-46 -948,-46 P1.3@-876,-118
SCK_7139: U2.60
SCS: U2.61
SDIO: U2.59
SIM_CLK: C3.2 D1.1 P6.3 R13.1 | length 365.4
  Top Layer w12: P6.3@-2796,-488 -2796,-610 -2771,-635 D1.1 R13.1@-2684,-756
SIM_DAT: C2.1 D4.1 P6.7 R16.1 | length 226.7
  Top Layer w12: P6.7@-2787,-437 -2751,-437 -2718,-470 D4.1 R16.1
SIM_RST: C4.1 D11.1 P6.2 R24.1 | length 232.1
  Top Layer w12: P6.2 -2753.8,-387.8 -2727,-361 C4.1@-2684,-361 ; D11.1 R24.1
STAT: U2.26 U3.15 | length 2006.3
  Top Layer w10: U3.15@-3292,-1286 -3268,-1286 -3252,-1270 -3252,-889 -3216,-853 -2539,-853 -2533,-847 -2533,-707 -2501,-675 -2163,-675 -2006,-518 U2.26@-1909,-518
VDD3.0: R5.1 R12.2 U3.19 U7.5 | length 588.2
  Top Layer w10: R12.2@-3348,-1892 R5.1@-3307,-1851
  Top Layer w12: U3.19@-3352,-1602 -3396,-1602 -3404,-1610 -3404,-1986 -3385,-2005 U7.5@-3345,-2005
  Top Layer w15: -3398,-1899 R12.2@-3366,-1899
VIBR: U2.8 U6.1 | length 976.7
  Top Layer w10: U2.8@-1588,-178 -1588,-367 v2@-1505,-450 ; v2@-1215,-450 -1001,-450 -911,-360 U6.1@-870,-360
  Bottom Layer w10: v2@-1503,-450 v2@-1215,-450
  other v2: -1504,-450 -1216,-450
VIN: F1.1 P4.3 | length 152.5
  Top Layer w80: F1.1 -361.02,-1688.98 P4.3
VSA: C17.2 D9.1 D10.2 U1.1 U1.2 U2.54 | length 1566
  Top Layer w10: U2.54@-1297,-548 v2(-1195,-548)
  Top Layer w12: v2@-998,-1366 C17.2@-947,-1366
  Top Layer w20: C17.2@-939,-1371 U1.2@-518,-1371
  Bottom Layer w12: v2(-1195,-548) -1180,-563 -1180,-1341 -1154,-1367 v2@-998,-1367
  other v2: -997,-1367
VSD: C32.1 D5.2 D19.1 R2.2 U5.7 | length 878.1
  Top Layer w12: C32.1@-1135,-1445 -350,-1445 -340,-1435 R2.2@-340,-1405
  Top Layer w40: U5.7@-1276,-1705 -1276,-1656
VSIM: C7.2 P6.1 U3.27 | length 1709.2
  Top Layer w15: v5@-2900,-984 -2900,-1537 -2750,-1687 U3.27@-2750,-1764 ; P6.1@-2779,-289 -2736,-289 -2708,-261 C7.2@-2683,-261
  Bottom Layer w15: v5(-2900,-983) -2900,-960 -2737,-797 v5@-2737,-291
  other v5: -2737,-290
WORK_LED: Q5.2 R7.2 | length 43
  Top Layer w15: R7.2@-2813,-1945 Q5.2@-2770,-1945
pads on no net: P6.0 P6.6 U1.5 U1.6 U1.7 U2.1 U2.4 U2.5 U2.6 U2.7 U2.9 U2.10 U2.12 U2.13 U2.14 U2.15 U2.16 U2.17 U2.18 U2.19 U2.25 U2.29 U2.30 U2.31 U2.32 U2.35 U2.37 U2.38 U2.39 U2.40 U2.41 U2.42 U2.43 U2.44 U2.45 U2.46 U2.49 U2.50 U2.58 U3.2 U3.3 U3.4 U3.5 U3.6 U3.7 U3.8 U3.9 U3.14 U3.16 U3.17 U3.18 U3.23 U3.24 U3.25 U3.26 U3.32 U3.41 U3.42 U4.4 U4.5 U4.6 U4.7 U4.13 U4.15 U4.16 U4.17 U5.2 U5.3 U5.5 U8.5 U10.3@-255,-1560

## Polygon pours and split planes (outlines as drawn)
GND on Top Layer "Top Layer-No Net" (solid, remove dead copper, pour order 1000): -3665,149 8,149 115,256 124,247 124,-2417 -3481,-2417 -3592,-2306
GND on Bottom Layer "Top Layer-No Net" (solid, remove dead copper, pour order 1001): -3499.95,160 -3451.29,112.23 67.81,112.23 67.81,-2321.07 82,-2335 -3723,-2335

## Keep-outs
Keep-Out Layer:
  circle w8: c-2401.57,-2047.24 r49.21
  circle w8: c-275.59,-2047.24 r49.21
  circle w8: c-2401.57,-78.74 r49.21
  circle w8: c-275.59,-78.74 r49.21
  lines w8: -3464.57,-2125.98 0,-2125.98 0,-749 -137,-749 -137,-448 0,-448 0,0 -3464.57,0 -3464.57,-2126

## Other copper
Top Layer:
  rectangle net GND: -340,-1210 -280,-1190
  rectangle net GND: -2626,-700 -2605,-628
  rectangle net NetL7_1: -381,-949 -341,-910
  rectangle net NetP5_1: -1790,-1293 -1715,-1006
  rectangle net NetQ3_3: -1886,-1292 -1828,-1148
  rectangle net +4.2V: -1836,-1392 -1698,-1332
  rectangle net NetL7_1: -375,-979 -146,-910
  rectangle net NetC12_1: -1685,-1765 -1315,-1685
  rectangle net VSD: -1310,-1535 -1125,-1430
  rectangle net VSD: -1310,-1609 -505,-1475
  rectangle net VSD: -1310,-1665 -1239,-1560
  rectangle net NetD5_1: -620,-1895 -515,-1770
  rectangle net NetD5_1: -565,-1895 -385,-1790
  rectangle net VSD: -655,-1710 -505,-1485
  rectangle net +4.2V: -2105,-1821 -1786,-1649
  rectangle net +4.2V: -2408,-1615 -2008,-1544
  rectangle net +4.2V: -2105,-1791 -2017,-1549
  rectangle net +4.2V: -1836,-1611 -1769,-1377
  rectangle net +4.2V: -2023,-1616 -1769,-1544
  rectangle net GND: -1111,-2099 -655,-1780
  rectangle net GND: -1105,-1913 -688,-1653
  rectangle net GND: -1344,-1860 -1150,-1812
  rectangle net GND: -1231,-1742 -1210,-1679
  rectangle net GND: -1233,-1692 -1200,-1678
  rectangle net GND: -790,-1297 -694,-1204
  rectangle net GND: -697,-1339 -592,-1268
  rectangle net GND: -987,-1301 -908,-1255
  rectangle net GND: -2405,-800 -2335,-745
  rectangle net GND: -2460,-815 -2345,-750
  pour cut-out: -1255,-654 -991,-654 -962,-625 -937,-625 -937,-692 -929,-700 -946,-717 -1267,-717
Bottom Layer:
  rectangle net GND: -1360,-1930 -1100,-1740

## Silkscreen, mask and mechanical layers (free items; w line width, h text height)
Top Overlay:
  lines w6: -1660,-1235 -1660,-1190 -1235,-1190 -1235,-1245 -1640,-1245 ; -435,-1120 -370,-1120 -370,-1300 -250,-1300 -245,-1300 -245,-1120 -325,-1120 -325,-1005 -435,-1005 -435,-1010 -435,-1120
  text "MO" at -1110,-60 h60
  text "MI" at -1010,-60 h60
  text "CK" at -915,-60 h60
  text "RS" at -815,-60 h60
  text "GPS Board V1.4.1" at -3215,-105 h60
  text "+" at -1660,-1055 h60
Top Solder:
  lines w31: -2453,-15 ccw(c-2401.9,-79.13) -2351.55,-14.4 ; -2452.34,-2111.73 cw(c-2402,-2047) -2350.9,-2111.13 ; -327,-15 ccw(c-275.9,-79.13) -225.55,-14.4 ; -325.45,-2111.6 cw(c-275.1,-2046.87) -224,-2111